# Altium PCB layout file.PcbDoc
Units mm, origin at the board's own origin, x right, y up, seen from the top; angles counter-clockwise.
Board outline 114.3 x 66.04 mm, 4 copper layers (Top Layer, Int1 (GND), Int2 (PWR), Bottom Layer), stack 1.97 mm thick; 35 components, 18 nets, 149 pads, 35 vias.
Unrouted connection lines stored in the file: 102.
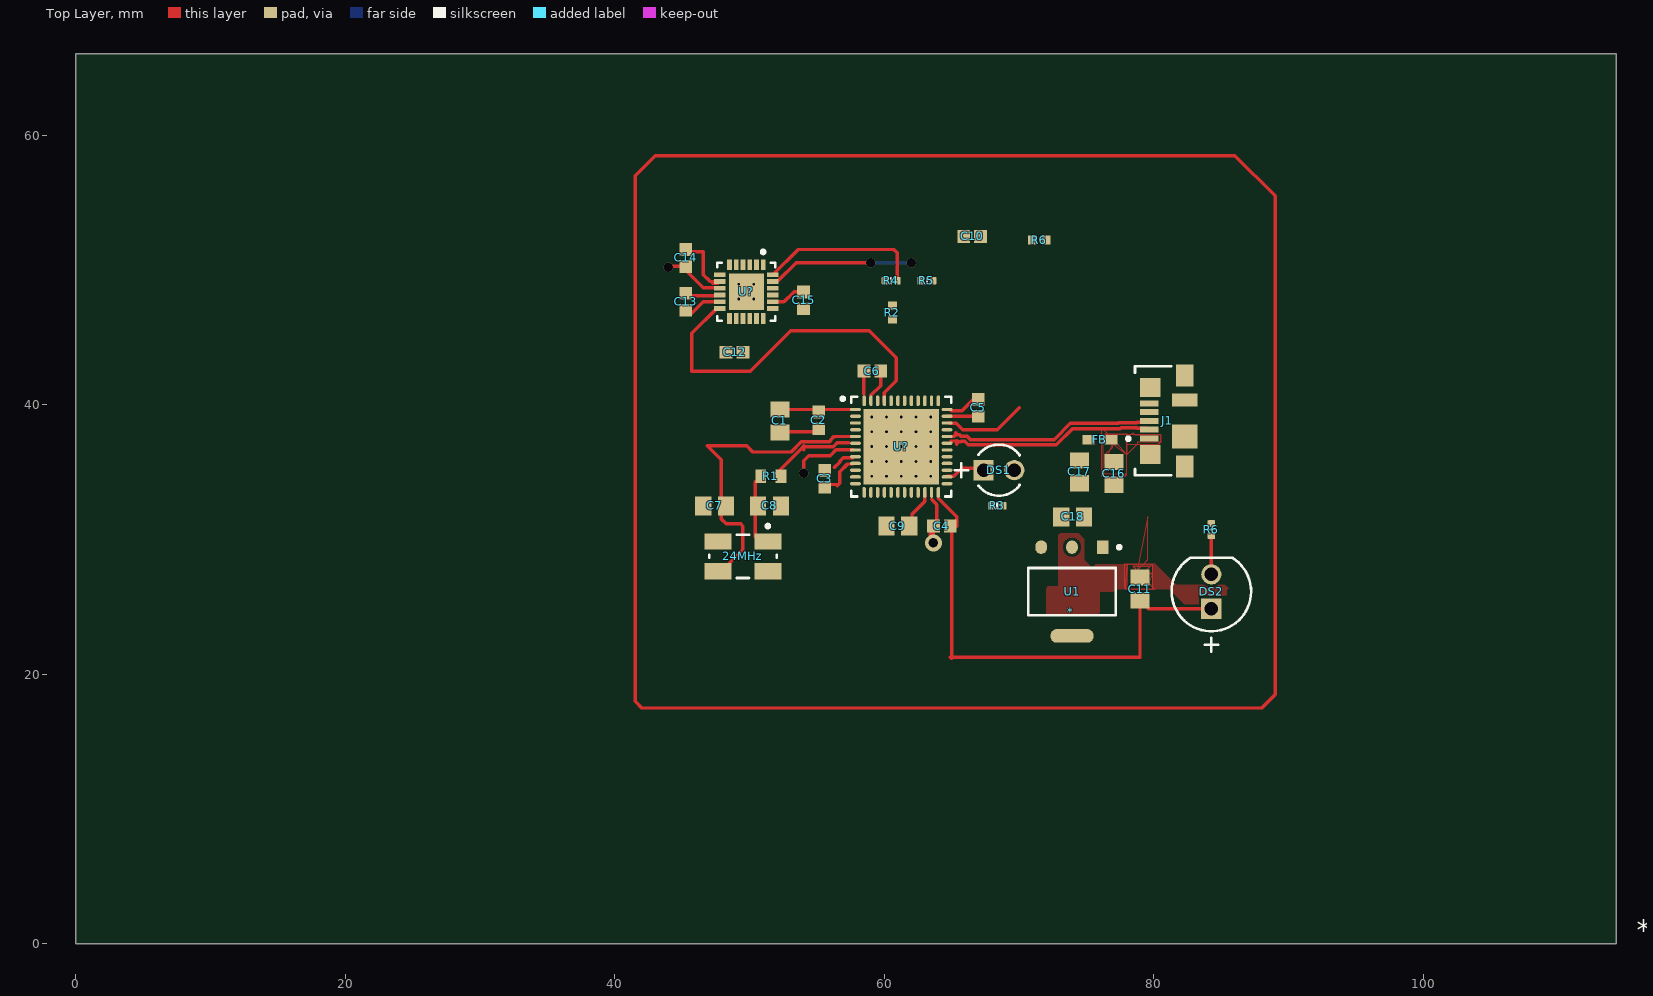
[diagram p0: Top Layer view]
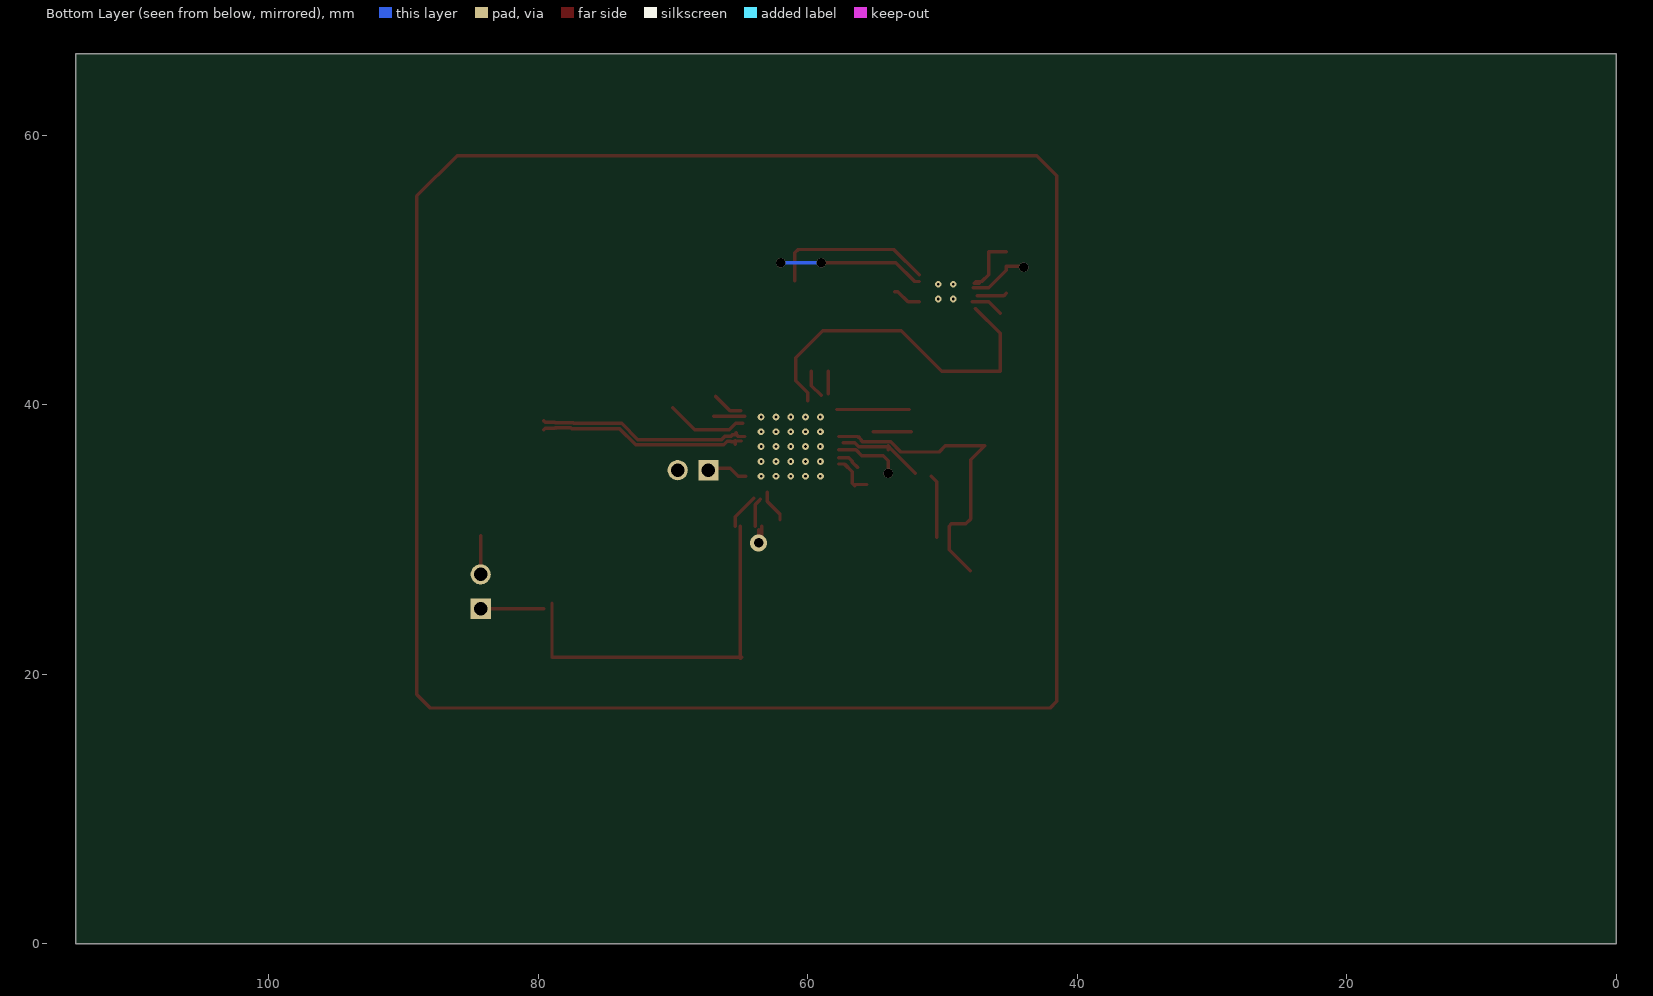
[diagram p1: Bottom Layer view, seen from below]
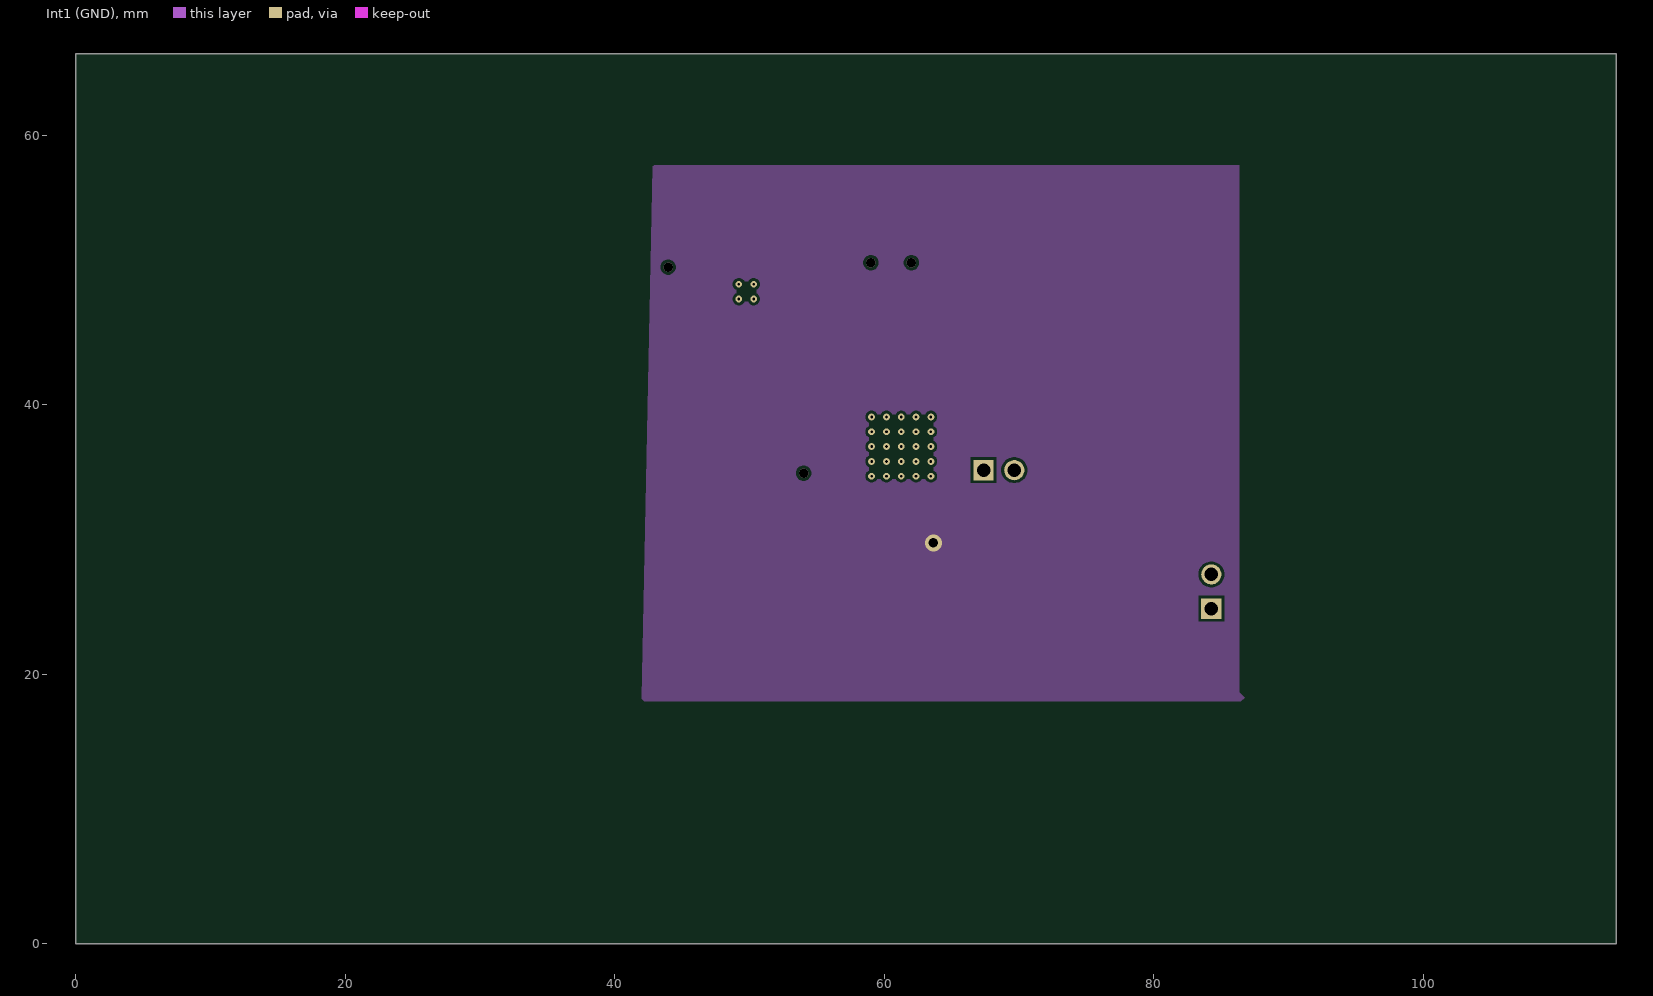
[diagram p2: Int1 (GND)]
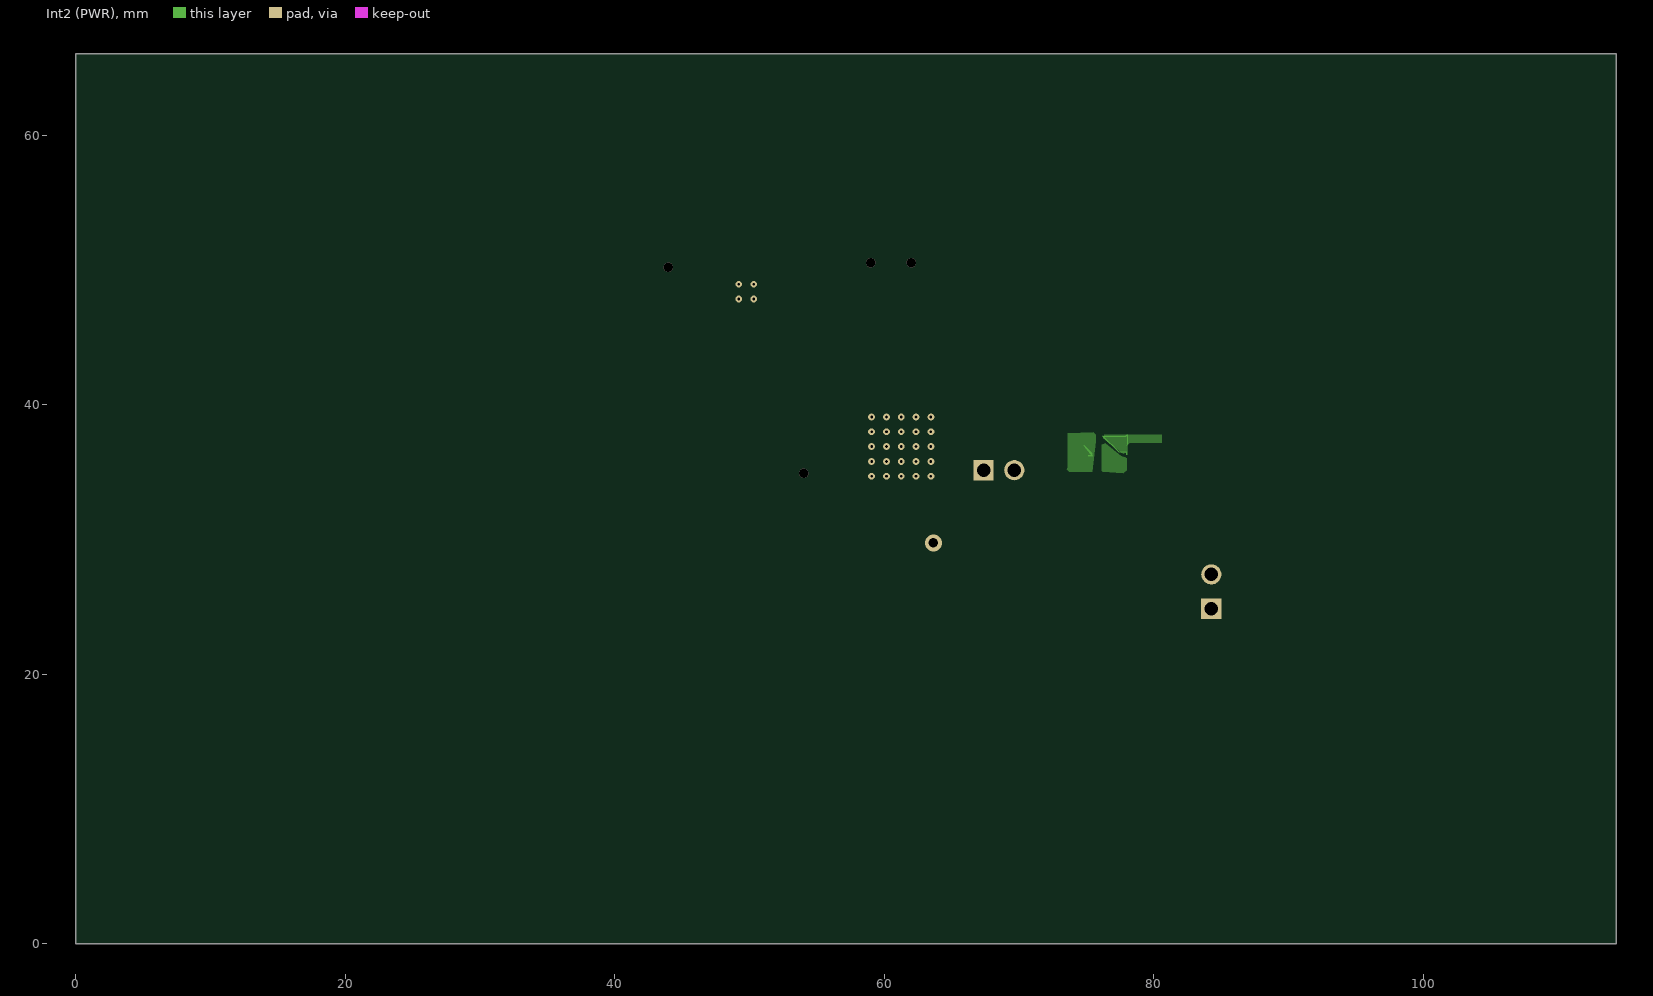
[diagram p3: Int2 (PWR)]

## Layer stack, top to bottom
Top Solder: solder mask 0.0254, SM-001, Dk 4
Top Layer: signal copper 0.035
Dielectric 1: prepreg 0.2, PP-017, Dk 4.6
Dielectric 2: prepreg 0.2, PP-017, Dk 4.6
Int1 (GND): signal copper 0.0175
Dielectric 3: core 1.065, Core-039, Dk 4.6
Int2 (PWR): signal copper 0.0175
Dielectric 4: prepreg 0.2, PP-017, Dk 4.6
Dielectric 5: prepreg 0.2, PP-017, Dk 4.6
Bottom Layer: signal copper 0.035
Bottom Solder: solder mask 0.0254, SM-001, Dk 4

## Board outline
0,0 114.3,0 114.3,66.04 0,66.04

## Design rules (kind name [scope] priority, off if disabled: settings)
Clearance [All] p1: gap=0.2 ignorepadtopadclearanceinfootprint=FALSE
DiffPairsRouting [All] p1: maxlimit=0.254 minlimit=0.127 mostfreqgap=0.254 toplayer_maxgap=0.127 toplayer_prefgap=0.127 toplayer_minwidth=0.26 toplayer_maxwidth=0.26 toplayer_prefwidth=0.26 bottomlayer_maxgap=0.127 bottomlayer_prefgap=0.127 bottomlayer_minwidth=0.26 bottomlayer_maxwidth=0.26 bottomlayer_prefwidth=0.26 impedanceprofiledriven=TRUE impedanceprofileid={D697CA2A-1080-4D15-A370-6E86792CAF9A} impedanceprofilevalue=90.000000 maxuncoupledlength=12.7
HoleSize [All] p1: absolutevalues=TRUE maxlimit=7.62 minlimit=0.254 maxpercent=80.000 minpercent=20.000
MinimumAnnularRing [All] p1: minimumring=0.254
PasteMaskExpansion [All] p1: expansion=0.254
PlaneClearance [All] p1: clearance=0.381
PlaneConnect [All] p1: pad.planeconnectstyle=Relief pad.reliefexpansion=0.508 pad.reliefentries=4 pad.reliefconductorwidth=0.254 pad.reliefairgap=0.254 via.planeconnectstyle=Direct via.reliefexpansion=0.508 via.reliefentries=4 via.reliefconductorwidth=0.254 via.reliefairgap=0.254
PolygonConnect [All] p1: thpad.connectstyle=Direct thpad.reliefconductorwidth=0.254 thpad.reliefentries=4 thpad.polygonreliefangle="90 Angle" thpad.airgapwidth=0.254 smdpad.connectstyle=Relief smdpad.reliefconductorwidth=0.254 smdpad.reliefentries=4 smdpad.polygonreliefangle="90 Angle" smdpad.airgapwidth=0.254 via.connectstyle=Direct via.reliefconductorwidth=0.254 via.reliefentries=4 via.polygonreliefangle="90 Angle" via.airgapwidth=0.254
RoutingVias [All] p1: holewidth=0.3 width=0.7 viastyle="Through Hole" minholewidth=0.25 minwidth=0.55 maxholewidth=0.4 maxwidth=0.9
SMDNeckDown [All] p1: percent=100.000
SilkToSolderMaskClearance SilkscreenOverComponentPads [IsPad] p1: minsilkscreentomaskgap=0.254 clearancetoexposedcopper=TRUE
SolderMaskExpansion [All] p1: expansion=0.254 istentingtop=FALSE
SupplyNets "Schematic Supply Nets_4" [InNet('VBUS')] p1: voltage=0.000
SupplyNets "Schematic Supply Nets_3" [InNet('+5V')] p2: voltage=0.000
SupplyNets "Schematic Supply Nets_1" [InNet('G')] p3: voltage=0.000
SupplyNets "Schematic Supply Nets" [InNet('+3v3')] p4: voltage=0.000
UnRoutedNet [All] p1: checkbadconnections=TRUE
Width [All] p1: maxlimit=1 minlimit=0.2 preferedwidth=0.3 midlayer1_minwidth=0.254 midlayer1_maxwidth=0.254 midlayer1_prefwidth=0.254 midlayer2_minwidth=0.254 midlayer2_maxwidth=0.254 midlayer2_prefwidth=0.254 minimp=50.000000 maximp=50.000000 favimp=50.000000
23 further rules are at their usual default settings.

## Classes and differential pairs
differential pair class USB: USB_D
component class Sheet1: 24MHz * *? C1 C2 C3 C4 C5 C6 C7 C8 C9 C10 C11 C12 C13 C14 C15 C16 C17 C18 DS1 DS2 FB J1 R1 R2 R3 R4 R5 R6 U1 U?
differential pair USB_D: +USB_D_P -USB_D_N

## Components (designator, comment, footprint, x,y, rotation, side; value= is the part's Value field where it differs from the comment)
24MHz "7" TXC-7B-4_V 49.5,28.75 r180 top
* "SM06B-GHS-TB" "New footprint 1" 73.821,24.59 r90 top
*? "DNP" MENNA-Footprint-1 115.722,-0.61 r90 top
C1 "Capacitor 1 uF +/- 10% 50 V 0805" CAPC2013X135X45NL10T25 52.25,38.8 r270 top value=1µF
C2 "Capacitor 100 nF +/-10% 50 V 0603" CAPC1608X90X40NL10T20 55.125,38.85 r270 top value=100nF
C3 "Capacitor 100 nF +/-10% 50 V 0603" CAPC1608X90X40NL10T20 55.575,34.5 r270 top value=100nF
C4 "Capacitor 100 nF +/-10% 50 V 0603" CAPC1608X90X40NL10T20 64.26,31 r0 top value=100nF
C5 "Capacitor 100 nF +/-10% 50 V 0603" CAPC1608X90X40NL10T20 66.96,39.775 r90 top value=100nF
C6 "Capacitor 100 nF +/-10% 50 V 0603" CAPC1608X90X40NL10T20 59.1,42.5 r180 top value=100nF
C7 "Capacitor 10 uF +/- 10% 16 V 0805" CAPC2013X135X45NL10T25 47.4,32.5 r180 top value=10pF
C8 "Capacitor 10 uF +/- 10% 16 V 0805" CAPC2013X135X45NL10T25 51.475,32.5 r180 top value=10pF
C9 "Capacitor 1 uF +/- 10% 50 V 0805" CAPC2013X135X45NL10T25 61,31 r0 top value=1µF
C10 "Capacitor 100 nF +/-10% 50 V 0603" CAPC1608X90X40NL10T20 66.51,52.497 r180 top value=100nF
C11 "Capacitor 1 uF +/- 10% 50 V 0805" CAPC2013X135X45NL10T25 78.969,26.325 r270 top value=22u
C12 "Capacitor 100 nF +/-10% 50 V 0603" CAPC1608X90X40NL10T20 48.875,43.9 r0 top value=100nF
C13 "Capacitor 100 nF +/-10% 50 V 0603" CAPC1608X90X40NL10T20 45.25,47.65 r90 top value=100nF
C14 "Capacitor 100 nF +/-10% 50 V 0603" CAPC1608X90X40NL10T20 45.25,50.9 r90 top value=10nF
C15 "Capacitor 100 nF +/-10% 50 V 0603" CAPC1608X90X40NL10T20 54,47.75 r90 top value=2n2
C16 "Capacitor 1 uF +/- 10% 50 V 0805" CAPC2013X135X45NL10T25 77.038,34.9 r90 top value=2u2
C17 "Capacitor 1 uF +/- 10% 50 V 0805" CAPC2013X135X45NL10T25 74.469,35.025 r90 top value=1µF
C18 "Capacitor 1 uF +/- 10% 50 V 0805" CAPC2013X135X45NL10T25 73.969,31.675 r180 top value=22u
DS1 "304090041" LED-2P-2.28-3MM_A 68.5,35.15 r0 top
DS2 "G" CGX-G502DC 84.265,26.141 r90 top
FB "BLM18AG121SN1D" MURA-BLM18-F-H1-CHIP-2_V 75.99,37.42 r180 top
J1 "473460001" FP-473460001-MFG 81.954,38.807 r90 top
R1 "Resistor 0R +/- 5% 0603 100 mW" RESC1608X55X25ML10T15 51.575,34.7 r180 top value=0
R2 "Resistor 10k +/-1% 0402 63 mW" RESC1005X40X25ML05T05 60.6,46.85 r270 top value=10k
R3 "47D5KR2F" RESC0402(1005)_L 68.375,32.5 r0 top value=1k
R4 "47D5KR2F" RESC0402(1005)_L 60.5,49.21 r180 top value=47.5k
R5 "47D5KR2F" RESC0402(1005)_L 63.15,49.21 r0 top value=47.5k
R6 "Resistor 10k +/-1% 0402 63 mW" RESC1005X40X25ML05T05 71.5,52.222 r0 top value=10k
R6 "25D5KR2F" RESC0402(1005)_L 84.265,30.734 r90 top value=1k
U1 "ams1117" FP-ams1117-IPC_C 73.923,26.141 r270 top
U? "STM32F411CEU6" STM-UFQFPN48_L 61.25,36.9 r0 top
U? "MPU-6050" IS-QFN-24_V 49.75,48.4 r270 top

## Footprints (in the part's own frame and the unit in brackets; to place one, negate y for a bottom-side part, rotate by r counter-clockwise, add the part's x,y. Pads: shape width x height; smd on the part's side, far side on the other; paste and mask are expansions set on the pad)
CAPC1608X90X40NL10T20 [mm] "Chip Capacitor, 2-Leads, Body 1.70x0.90mm, IPC Medium Density"
  rect 0.95x0.95 smd: 1(-0.625,0) 2(0.625,0)
  body extent -0.85,-0.45 0.85,0.45, height 0.9
CAPC2013X135X45NL10T25 [mm] "Chip Capacitor, 2-Leads, Body 2.10x1.35mm, IPC Medium Density"
  rect 1.2x1.4 smd: 1(-0.85,0) 2(0.85,0)
  body extent -1.05,-0.67 1.05,0.67, height 1.35
CGX-G502DC [mm] "THD, 2-Leads, Dia 5.9mm, Pin Spacing 2.54mm"
  rect 1.5x1.5 hole 1: 1(-1.27,0)
  round 1.5 hole 1: 2(1.27,0)
  silkscreen extent -4.45,-2.95 2.5,2.95, body extent -2.95,-2.95 2.5,2.95, height 9.1
FP-473460001-MFG [mm]
  rect 0.45x1.38 smd paste+0 mask+0: 1(-1.3,2.31) 2(-0.65,2.31) 3(0,2.31) 4(0.65,2.31) 5(1.3,2.31)
  rect 1.425x1.55 smd paste+0 mask+0: 6(-2.488,2.225) 7(2.488,2.225)
  rect 1.65x1.3 smd paste+0 mask+0: 8(-3.375,-0.35) 11(3.375,-0.35)
  rect 1.8x1.9 smd paste+0 mask+0: 9(-1.15,-0.35)
  rect 1x1.9 smd paste+0 mask+0: 10(1.55,-0.35)
  silkscreen extent -4.05,0.67 4.05,3.97, body extent -4.3,-2.48 4.3,3.45, height 0.25
FP-ams1117-IPC_C [mm]
  rect 1.004x0.872 smd paste+0 mask+0: 1(-3.295,2.29)
  rrect100% 1.004x0.872 smd paste+0 mask+0: 2(-3.295,0) 3(-3.295,-2.29)
  rrect87% 1.004x3.182 smd paste+0 mask+0: 4(3.295,0)
  silkscreen extent -3.42,-3.25 1.75,3.63, body extent -3.9,-3.35 3.9,3.35, height 0.25
IS-QFN-24_V [mm] "QFN, 24-Leads, Body 4x4mm, Pitch 0.5mm, Thermal Pad 2.7x2.6mm"
  rect 0.8x0.35 smd: 1(-2,1.25) 2(-2,0.75) 3(-2,0.25) 4(-2,-0.25) 5(-2,-0.75) 6(-2,-1.25) 13(2,-1.25) 14(2,-0.75) 15(2,-0.25) 16(2,0.25) 17(2,0.75) 18(2,1.25)
  rect 0.35x0.85 smd mask+0.102: 7(-1.25,-1.975) 8(-0.75,-1.975) 9(-0.25,-1.975) 10(0.25,-1.975) 11(0.75,-1.975) 12(1.25,-1.975) 19(1.25,1.975) 20(0.75,1.975) 21(0.25,1.975) 22(-0.25,1.975) 23(-0.75,1.975) 24(-1.25,1.975)
  rect 2.7x2.6 smd: 25(0,0)
  silkscreen extent -3.07,-2.15 2.15,2.15, body extent -2,-2 2,2, height 0.95
LED-2P-2.28-3MM_A [mm] "LED, 2-Leads, Dia 3mm, Pitch 2.28mm"
  rect 1.5x1.5 hole 1: 1(-1.14,0)
  round 1.5 hole 1: 2(1.14,0)
  silkscreen extent -3.29,-1.9 1.52,1.9, body extent -1.9,-1.91 1.52,1.91, height 5.3
MENNA-Footprint-1 [mm]
MURA-BLM18-F-H1-CHIP-2_V [mm] "Chip Ferrite Bead, 2-Leads, Body 1.6x0.8mm, Height 0.95mm, Flow"
  rect 0.95x0.7 smd: 1(-0.825,0) 2(0.825,0)
  body extent -0.87,-0.48 0.87,0.48, height 0.95
"New footprint 1" [mm]
RESC0402(1005)_L [mm] "Chip Resistor, Body 1.0x0.5mm, IPC High Density"
  rrect25% 0.5x0.55 smd: 1(-0.45,0) 2(0.45,0)
  silkscreen extent 0,-0.2 0,0.2, body extent -0.5,-0.25 0.5,0.25, height 0.3
RESC1005X40X25ML05T05 [mm] "Chip Resistor, 2-Leads, Body 1.05x0.55mm, IPC Low Density"
  rect 0.65x0.65 smd: 1(-0.5,0) 2(0.5,0)
  body extent -0.53,-0.28 0.53,0.28, height 0.4
RESC1608X55X25ML10T15 [mm] "Chip Resistor, 2-Leads, Body 1.70x0.90mm, IPC Low Density"
  rect 0.8x1 smd: 1(-0.75,0) 2(0.75,0)
  body extent -0.85,-0.45 0.85,0.45, height 0.55
STM-UFQFPN48_L [mm] "QFN, 48-Leads, Body 7.1x7.1mm, Pitch 0.5mm, Thermal Pad 5.6x5.6mm, IPC High Density"
  oval 0.8x0.25 smd: 1(-3.4,2.75) 2(-3.4,2.25) 3(-3.4,1.75) 4(-3.4,1.25) 5(-3.4,0.75) 6(-3.4,0.25) 7(-3.4,-0.25) 8(-3.4,-0.75) 9(-3.4,-1.25) 10(-3.4,-1.75) 11(-3.4,-2.25) 12(-3.4,-2.75) 25(3.4,-2.75) 26(3.4,-2.25) 27(3.4,-1.75) 28(3.4,-1.25) 29(3.4,-0.75) 30(3.4,-0.25) 31(3.4,0.25) 32(3.4,0.75) 33(3.4,1.25) 34(3.4,1.75) 35(3.4,2.25) 36(3.4,2.75)
  oval 0.25x0.8 smd: 13(-2.75,-3.4) 14(-2.25,-3.4) 15(-1.75,-3.4) 16(-1.25,-3.4) 17(-0.75,-3.4) 18(-0.25,-3.4) 19(0.25,-3.4) 20(0.75,-3.4) 21(1.25,-3.4) 22(1.75,-3.4) 23(2.25,-3.4) 24(2.75,-3.4) 37(2.75,3.4) 38(2.25,3.4) 39(1.75,3.4) 40(1.25,3.4) 41(0.75,3.4) 42(0.25,3.4) 43(-0.25,3.4) 44(-0.75,3.4) 45(-1.25,3.4) 46(-1.75,3.4) 47(-2.25,3.4) 48(-2.75,3.4)
  rect 5.6x5.6 smd: 49(0,0)
  silkscreen extent -4.47,-3.7 3.7,3.7, body extent -3.55,-3.55 3.55,3.55, height 0.6
TXC-7B-4_V [mm] "SMD, 4-Leads, Body 5x3.2mm, Pitch 3.7mm"
  rect 2x1.2 smd: 1(-1.85,-1.1) 2(1.85,-1.1) 3(1.85,1.1) 4(-1.85,1.1)
  silkscreen extent -2.5,-2.37 2.5,1.6, body extent -2.5,-1.6 2.5,1.6, height 1.05

## Part data
24MHz: library part CMP-003-00011-2, "SMD Seam Sealing Crystal, 24 MHz, +/- 30 ppm, 18 pF, -10 to 70 degC, 4-Pin SMD, RoHS, Tape and Reel", Case/Package=7B-4, Frequency=24MHz, Frequency Tolerance=30ppm, Load Capacitance=18pF, Manufacturer=TXC, Max Operating Temperature=70°C, Min Operating Temperature=-20°C, Package Description="4-Pin Surface Mount Device, Body 5 x 3.2 mm, Pitch 3.7 mm", Package Quantity=1000, Resistance=40Ohm, Datasheet URL=http://www.txccorp.com/download/products/quartz_crystals/2015TXC_7B_19.pdf, Datasheet Version=Jul-15, ESR=40, Mounting Technology=SM, Package Reference=7B-4, Packaging=TapeandReel, Pins=4, RoHS Compliant=True, Tolerance=30ppm
*: library part CMP-002-00072-3
*?: library part CMP-002-00071-1
C1 C9 C11 C16 C17 C18: library part CMP-001-00007-6, "Chip Capacitor, 1 uF, +/- 10%, 50 V, 0805 (2012 Metric)", Capacitor Type=Ceramic, Case/Package=0805, Max Operating Temperature=125°C, Min Operating Temperature=-55°C, Tolerance=10%, Voltage Rating=50V, Mounting Technology=SM, Pins=2, RoHS Compliant=True
C2 C3 C4 C5 C6 C10 C12 C13 C14 C15: library part CMP-001-00017-6, "Chip Capacitor, 100 nF, +/- 10%, 50 V, 0603 (1608 Metric)", Capacitor Type=Ceramic, Case/Package=0603, Max Operating Temperature=125°C, Min Operating Temperature=-55°C, Tolerance=10%, Voltage Rating=50V, Mounting Technology=SM, Pins=2, RoHS Compliant=True
C7 C8: library part CMP-001-00015-6, "Chip Capacitor, 10 uF, +/- 10%, 16 V, 0805 (2012 Metric)", Capacitor Type=Ceramic, Case/Package=0805, Max Operating Temperature=85°C, Min Operating Temperature=-55°C, Tolerance=10%, Voltage Rating=16V, Mounting Technology=SM, Pins=2, RoHS Compliant=True
DS1: library part CMP-007-00007-2, "Red LED, 80 mW, 30 mA, -25 to 85 degC, 2-Pin THD", Manufacturer="Shenzhen CGX", Package Description="2-Pin Through Hole Device, Dia 3 mm, Pitch 2.28 mm", Case/Package=304090041, Datasheet URL=http://datasheet.octopart.com/304090041-Chengguangxing-datasheet-62330656.pdf, Datasheet Version=Sep-14, Manufacturer URL=http://szcgx.com/, Mounting Technology=TH, Package Reference=304090041, RoHS Compliant=Unknown
DS2: library part CMP-007-00008-2, "Green LED, 80 mW, 20 mA, -25 to 85 degC, 2-Pin THD", Case/Package=G502DC, Manufacturer="Shenzhen CGX", Package Description="2-Pin Through Hole Device, Dia 5.9 mm", Datasheet URL=http://datasheet.octopart.com/G502DC-Chengguangxing-datasheet-62330340.pdf, Datasheet Version=Sep-14, Manufacturer URL=http://szcgx.com/, Mounting Technology=TH, Package Reference=G502DC, RoHS Compliant=Unknown
FB: library part CMP-006-00004-3, "Chip Ferrite Bead for General Use, 120 Ohm, 500 mA, -55 to 125 degC, 0603 (1608 Metric), RoHS, Tape and Reel", Case/Package=0603, Current Rating=500mA, Manufacturer=Murata, Max Operating Temperature=125°C, Min Operating Temperature=-55°C, Package Quantity=4000, Package Reference=BLM18_H950-2, Resistance=200mohm, Tolerance=25%, Core Material=Ferrite, Datasheet URL=https://statics3.seeedstudio.com/images/opl/datasheet/303010016.pdf, Datasheet Version=Jun-12, Impedance=120Ohm, Max Current Rating=500mA, Packaging=TapeandReel, RoHS Compliant=True
J1: library part CMP-2000-05246-2, "CONN RCPT USB2.0 MICRO B SMD R/A", Current Rating=1.8A, Manufacturer=Molex, Package=0, Temperature="-30°C to +85°C", Temperature Range High=+85°C, Temperature Range Low=-30°C, Voltage Rating=30V, Automotive=No, Category=Conn, ComponentLink2Description=Datasheet, ComponentLink2URL=https://www.molex.com/webdocs/datasheets/pdf/en-us/0473460001_IO_CONNECTORS.pdf, Conn Orientation="Right Angle", Contact Material=Gold,Nickel, Device Class L1=Connectors, Device Class L2="USB Connectors", Device Class L3=unset, Digikey Description="CONN RCPT USB2.0 MICRO B SMD R/A", Footprint Url=https://www.molex.com/pdm_docs/sd/473460001_sd.pdf, Height=2.945mm, Is Female=yes, Lead Free=Yes, Manufacturer Part Number=473460001, Number Of Contacts=5, Octopart=https://octopart.com/47346-0001-molex-7164928, Pitch=0.65mm, RoHS=TRUE, Shielding=true, Usb Standard="USB 2.0"
R1: library part CMP-009-00006-5, "Chip Resistor, 0 Ohm, 0.1 W, -55 to 155 degC, 0603 (1608 Metric)", Case/Package=0603, Max Operating Temperature=155°C, Min Operating Temperature=-55°C, Power=100mW, Tolerance=5%, Voltage Rating=50V, Mounting Technology=SM, Pins=2, RoHS Compliant=True
R2 R6: library part CMP-009-00019-5, "Chip Resistor, 10 KOhm, +/- 1%, 63 mW, -55 to 155 degC, 0402 (1005 Metric)", Case/Package=0402, Max Operating Temperature=155°C, Min Operating Temperature=-55°C, Power=63mW, Tolerance=1%, Voltage Rating=50V, Mounting Technology=SM, Pins=2, RoHS Compliant=True
R3 R4 R5: library part CMP-009-00103-2, "47K5 0.063W 1% 0402 (1005 Metric)  SMD", Case/Package=0402, Power=63mW, Tolerance=1%, Mounting Technology=SMT, Pins=2
R6: library part CMP-009-00085-2, "25K5 0.063W 1% 0402 (1005 Metric)  SMD", Case/Package=0402, Power=63mW, Tolerance=1%, Mounting Technology=SMT, Pins=2
U1: library part CMP-209535-000002-1, "1A LOW DROPOUT VOLTAGE REGULATOR", RoHS Compliant=Yes
U?: library part CMP-0243-00165-1, "ARM Cortex-M4 32-bit MCU+FPU, 512 KB Flash, 128 KB RAM, 36 I/Os, 48-Pin UFQFPN, -40 to 85 degC, Tray", I/Os (High Current)=36, Operating Frequency(F) (Processor speed) (MHz)=100, Package Description=UFQFPN48, Package Reference="48-Pin Ultra Thin Fine Pitch Quad Flat No-Lead, 7 x 7 x 0.6 mm Body, 0.5 mm Pitch, Exposed Pad", Supply Voltage(Vcc) min (V)=1.7, ComponentLink1Description="Manufacturer URL", ComponentLink1URL=http://www.st.com/, ComponentLink2Description=Datasheet, ComponentLink2URL=http://www.st.com/st-web-ui/static/active/en/resource/technical/document/datasheet/DM00115249.pdf, Core="ARM Cortex-M4", DatasheetVersion="Rev. 6", FLASH Size (Prog) (kB)=512, Internal RAM Size (kB)=128, Mounting Technology="Surface Mount", Packing=Tray
U?: library part CMP-1753-00002-2, "3-Axis Gyroscope, Accelerometer and a Digital Motion Processor(TM) (DMP), 2.375 to 3.46 V, -40 to 85 degC, 24-Pin QFN, RoHS, Tape and Reel", Manufacturer=InvenSense, Standard Package=5,000, Category=Sensors,Transducers, Datasheet URL=http://datasheet.octopart.com/MPU-6050-InvenSense-datasheet-14421344.pdf, Datasheet Version="Rev. 3.3, 05/2012", Dynamic Catalog=MPU-6000™Series, Family=Multifunction, Featured Product=MPU-60506-Axis,IntegratedI²CSolution, Manufacturer URL=http://www.invensense.com/, Online Catalog=MPU-6000™Series, Other Names="1428-1007-2 / MPU6050", Output Type=Digital, Sensor Type=MotionTracking, Unit PriceUSD=Digital

## Via types
v1: diameter 0.5, hole 0.2, Top Layer to Bottom Layer, 29 vias
v2: diameter 0.711, hole 0.711, Top Layer to Bottom Layer, 5 vias
v3: diameter 1.27, hole 0.711, Top Layer to Bottom Layer, 1 vias

## Nets (pads, with @x,y where several pads share a name; then routed paths per layer and width w, separated by ;. In a path a pad name is that pad's centre, name@x,y a point inside that pad or via, vN(x,y) a via of type N, cw(c..) or ccw(c..) an arc to the next point about the centre after c; other vN are vias at no path point)
+3v3: 24MHz.2 24MHz.3 24MHz.4 C1.1 C1.2 C2.1 C2.2 C3.1 C3.2 C4.1 C4.2 C5.1 C5.2 C6.1 C6.2 C7.1 C7.2 C8.1 C9.1 C10.1 C11.2 C12.1 C12.2 C13.1 C14.2 C15.1 DS2.1 J1.5 R1.1 R2.1 R3.2 R4.2 R5.2 R6.1@84.265,30.284 R6.2@72,52.222 U1.2 U1.4 U?.1@57.85,39.65 U?.8 U?.9@57.85,35.65 U?.13@48.5,46.4 U?.18@51,46.4 U?.23@63.5,33.5 U?.24@64,33.5 U?.25@49.75,48.4 U?.35 U?.36 U?.47 U?.48
  other v1: 59.05,34.7 60.15,34.7 61.25,34.7 62.35,34.7 63.45,34.7 59.05,35.8 60.15,35.8 61.25,35.8 62.35,35.8 63.45,35.8 59.05,36.9 60.15,36.9 61.25,36.9 62.35,36.9 63.45,36.9 59.05,38 60.15,38 61.25,38 62.35,38 63.45,38 59.05,39.1 60.15,39.1 61.25,39.1 62.35,39.1 63.45,39.1 49.2,47.85 50.3,47.85 49.2,48.95 50.3,48.95
+5V: C17.2 C18.2 FB.2 U1.3
G: C11.1 C14.1 C16.1 C17.1 C18.1 U1.1 U?.1@51,50.4 U?.9@47.775,48.65 U?.11@47.775,47.65 U?.49
Net24MHz_1: 24MHz.1 C8.2 U?.5@57.85,37.65
NetC9_2: C9.2 U?.22@63,33.5
NetC10_2: C10.2 R6.1@71,52.222 U?.7@57.85,36.65
NetC13_2: C13.2 U?.10@47.775,48.15
NetC15_2: C15.2 U?.20@51.725,47.65
NetDS1_1: DS1.1 U?.26
NetDS1_2: DS1.2 R3.1
NetDS2_2: DS2.2 R6.2@84.265,31.184
NetR1_2: R1.2 U?.6@57.85,37.15
NetR2_2: R2.2 U?.44
NetR4_1: R4.1 U?.43
NetR5_1: R5.1 U?.42
USB_D_N: J1.2 | length 15.2
  Top Layer w0.26: 65.38,37.077 65.38,37.235 65.432,37.287 65.38,37.339 65.457,37.262 65.673,37.262 65.698,37.287 65.974,37.287 66.228,37.033 72.757,37.033 73.957,38.233 77.516,38.233 77.565,38.281 78.712,38.281 78.748,38.245 79.48,38.245 J1.2@79.575,38.15
USB_D_P: J1.3 | length 15.1
  Top Layer w0.26: 65.31,37.908 65.361,37.857 65.361,37.779 65.574,37.779 65.679,37.674 66.134,37.674 66.388,37.42 72.597,37.42 73.797,38.62 77.356,38.62 77.404,38.669 78.712,38.669 78.748,38.705 79.48,38.705 J1.3@79.575,38.8
VBUS: C16.2 FB.1 J1.1
pads on no net: J1.4 J1.6 J1.7 J1.8 J1.9 J1.10 J1.11 U?.2 U?.3 U?.4 U?.5@49,50.4 U?.6@48.5,50.4 U?.7@47.775,49.65 U?.10@57.85,35.15 U?.11@57.85,34.65 U?.12 U?.13@58.5,33.5 U?.14 U?.15 U?.16 U?.17 U?.18@61,33.5 U?.19 U?.20@62,33.5 U?.21 U?.22@51.725,48.65 U?.23@51.725,49.15 U?.24@51.725,49.65 U?.25@64.65,34.15 U?.27 U?.28 U?.29 U?.30 U?.31 U?.32 U?.33 U?.34 U?.37 U?.38 U?.39 U?.40 U?.41 U?.45 U?.46
copper on no net: | length 354.4
  Top Layer w0.254: v2@44.25,50.275 45.25,50.275 45.25,50 46.55,48.7 47.725,48.7 ; 45.25,48.275 45.425,48.1 47.425,48.1 ; 45.25,51.35 46.55,51.35 46.55,49.66 47.06,49.15 47.495,49.15 47.635,49.01 47.25,49.01 ; 45.7,46.8 46.55,47.65 47.775,47.65 ; 47.55,47.15 45.7,45.3 45.7,42.5 50.05,42.5 53.05,45.5 58.875,45.5 60.875,43.5 60.875,41.775 60,40.9 60,40.3 ; 47.925,27.675 49.5,29.25 49.5,31 49.325,31.175 48.25,31.175 47.9,31.525 47.9,32.5 47.9,35.91 46.85,36.96 49.775,36.96 50.235,36.5 53.075,36.5 53.837,37.262 55.937,37.262 56.01,37.335 56.01,37.4 56.26,37.65 57.7,37.65 ; 50.425,30.15 50.425,34.3 50.825,34.7 ; 51.725,47.65 52.55,47.65 53.3,48.4 53.55,48.4 ; 51.725,49.15 52.05,49.15 53.45,50.55 v2@59.1,50.55 ; 51.725,49.65 53.6,51.525 60.7,51.525 60.95,51.275 60.95,49.21 ; 52.025,34.925 53.95,36.85 53.95,36.9 ; 52.3,38 55.125,38 ; 52.45,39.65 56.675,39.65 57.85,39.65 ; v2@54,35.225 54,35.863 54.372,36.235 54.497,36.235 55.97,36.235 56.41,36.675 56.499,36.675 57.7,36.675 ; 54,36.675 54,36.95 53.95,36.9 ; 55.612,34.087 56.587,34.087 ; 56.275,35.35 56.675,35.75 56.675,35.8 56.95,36.075 57.7,36.075 ; 56.499,33.999 56.675,34.175 56.675,35.025 57.26,35.61 57.35,35.61 57.7,35.61 ; 57.35,37.2 56.492,37.2 56.192,36.9 53.95,36.9 ; 58.475,40.825 58.475,42.5 ; 59,40.7 59.725,41.425 59.725,42.5 ; 62.05,31.45 62.05,31.875 63,32.825 63,33.5 ; 63.41,31 63.41,30.051 63.5,29.961 63.635,30.096 63.635,30.734 ; 63.5,33 63.6,32.9 63.9,32.6 63.9,31 ; 64,33.075 65.375,31.7 65.375,31 ; 64.58,34.7 65.15,34.7 65.75,35.3 67.135,35.3 ; 64.65,37.65 65.15,37.65 65.357,37.857 65.361,37.857 ; 64.65,39.15 65.648,39.15 66.01,39.15 66.96,39.15 ; 64.8,38.62 65.334,38.62 65.804,38.15 68.375,38.15 70.02,39.795 ; 64.913,37.313 65.406,37.313 ; 64.95,39.55 65.15,39.55 65.76,39.55 66.835,40.625 ; 64.989,31 64.989,21.171 64.885,21.275 78.969,21.275 78.969,25.275 ; 79.573,24.871 84.265,24.871 ; 84.265,27.411 84.265,30.284 ; 41.5,18 42,17.5 88,17.5 89,18.5 89,55.5 86,58.5 43,58.5 41.5,57 41.5,18
  Bottom Layer w0.254: v2(59,50.55) v2@61.77,50.55
  other v2: 54,34.925 43.95,50.225 62,50.55 62,50.55
  other v3: 63.635,29.751

## Polygon pours and split planes (outlines as drawn)
no net on Top Layer "NONET_L01_P021" (solid, pour order 21): 78.712,27.536 78.712,27.682 79.538,28.509 79.538,31.7
no net on Top Layer "NONET_L01_P020" (solid, pour order 20): 78.061,28.172 79.894,28.172 79.894,26.35 79.919,26.325 77.89,26.325
no net on Top Layer "NONET_L01_P019" (solid, pour order 19): 79.919,27.411 79.083,27.411 78.957,27.536 79.919,27.536 79.919,28 79.821,28.098 79.405,27.682 79.747,28.025 78.469,28.025 78.469,28 79.644,26.825
no net on Top Layer "NONET_L01_P018" (solid, pour order 18): 78.469,28.025 79.747,28.025 79.894,28.172 77.795,28.172 77.795,26.549 78.019,26.325 80.048,26.325
no net on Top Layer "NONET_L01_P017" (solid, pour order 17): 74.423,30.459 73.053,30.459 72.919,30.325 72.919,26.526 72.126,26.526 72,26.4 72,24.5 75.879,24.5 75.99,24.389 75.99,26.141 76.992,26.141 77.176,26.325 81.123,26.325 83.754,23.694 83.981,23.921 85.415,23.921 85.415,26.24 85.55,26.375 85.274,26.651 81.664,26.651 80.019,28.297 79.894,28.172 75.697,28.172 75.419,27.894 74.819,28.494 74.819,30.039
no net on Top Layer "NONET_L01_P009" (solid, pour order 9): 80.5,37.779 76.205,37.779 76.088,37.896 76.088,34.7 77.888,34.7 77.988,34.8 77.988,37.079 80.309,37.079 80.5,37.269
no net on Top Layer "NONET_L01_P008" (solid, pour order 8): 79.538,37.779 76.144,37.779 76.088,37.835 76.088,34.7 77.888,34.7 77.988,34.8 77.988,37.079 80.309,37.079 80.5,37.269 80.5,37.779
no net on Top Layer "NONET_L01_P007" (solid, pour order 7): 76.898,37.02 76.898,36.831 76.363,36.296 76.363,35.65
no net on Top Layer "NONET_L01_P006" (solid, pour order 6): 79.538,37.779 76.205,37.779 76.088,37.896 76.088,34.9 77.988,34.9 77.988,37.079 80.309,37.079 80.5,37.269 80.5,37.779
no net on Top Layer "NONET_L01_P005" (solid, pour order 5): 79.538,37.779 76.479,37.779 76.401,37.857 76.088,37.545 76.088,34.9 77.788,34.9 77.888,34.8 77.988,34.9 77.988,37.079 80.309,37.079 80.5,37.269 80.5,37.779
no net on Top Layer "NONET_L01_P004" (solid, pour order 4): 79.538,37.779 76.667,37.779 76.213,38.233 76.088,38.108 76.088,34.7 77.788,34.7 77.988,34.9 77.988,37.079 80.344,37.079 80.5,37.235 80.5,37.779
no net on Top Layer "NONET_L01_P003" (solid, pour order 3): 76.898,36.187 76.898,35.585 76.288,34.975 76.363,34.9 77.538,34.9
no net on Top Layer "NONET_L01_P002" (solid, pour order 2): 77.038,37.42 77.101,37.357 77.101,36.985 76.898,36.985 76.213,37.67 76.401,37.857 77.988,37.857 77.988,36.301
no net on Top Layer "NONET_L01_P001" (solid, pour order 1): 76.213,37.67 76.213,35.05 76.363,34.9 77.988,34.9 77.988,37.473 78.435,37.92 78.576,37.779 80.5,37.779 80.5,37.2 80.465,37.235 78.748,37.235 78.748,37.061 77.988,36.301
no net on Int2 (PWR) "NONET_L03_P015" (solid, pour order 15): 75.419,36.235 75.419,36.373 74.819,36.973
no net on Int2 (PWR) "NONET_L03_P014" (solid, pour order 14): 75.419,36.235 75.146,36.235 75.144,36.237
no net on Int2 (PWR) "NONET_L03_P013" (solid, pour order 13): 75.669,37.973 75.669,37.287 75.419,35.025 73.726,35.025 73.519,35.232 73.621,35.334 73.621,37.896
no net on Int2 (PWR) "NONET_L03_P012" (solid, pour order 12): 77.988,36.301 77.988,36.466 77.418,36.466 76.213,37.67 77.899,37.67 78.008,37.779
no net on Int2 (PWR) "NONET_L03_P011" (solid, pour order 11): 77.988,34.9 77.988,37.632 77.841,37.779 76.3,37.779 76.205,37.873 76.144,37.812 76.144,35.119 76.213,35.05
no net on Int2 (PWR) "NONET_L03_P010" (solid, pour order 10): 75.926,37.776 77.938,36.174 77.938,36.926 78.209,37.197 80.6,37.197 80.6,37.776
no net on Int1 (GND) "NONET_L02_P016" (solid, pour order 16): 42.8,57.9 42.925,57.775 86.325,57.775 86.325,18.675 86.725,18.275 86.45,18 42,18

## Text inside footprints (layer, text, board x,y; h text height)
FB: Mechanical 6 "Land Pattern Adapted for Flow Soldering" at 76.99,36.82 h0.05 r180